# Altium PCB Car-PCB1.PcbDoc (part 2 of 4)
Units mil, origin at the board's own origin, x right, y up, seen from the top; angles counter-clockwise.
Board outline 2206 x 4474.17 mil, 4 copper layers (L1_Top, L2_GND, L3_PWR, L4_BOT), stack 60.912 mil thick; 163 components, 139 nets, 610 pads, 297 vias.
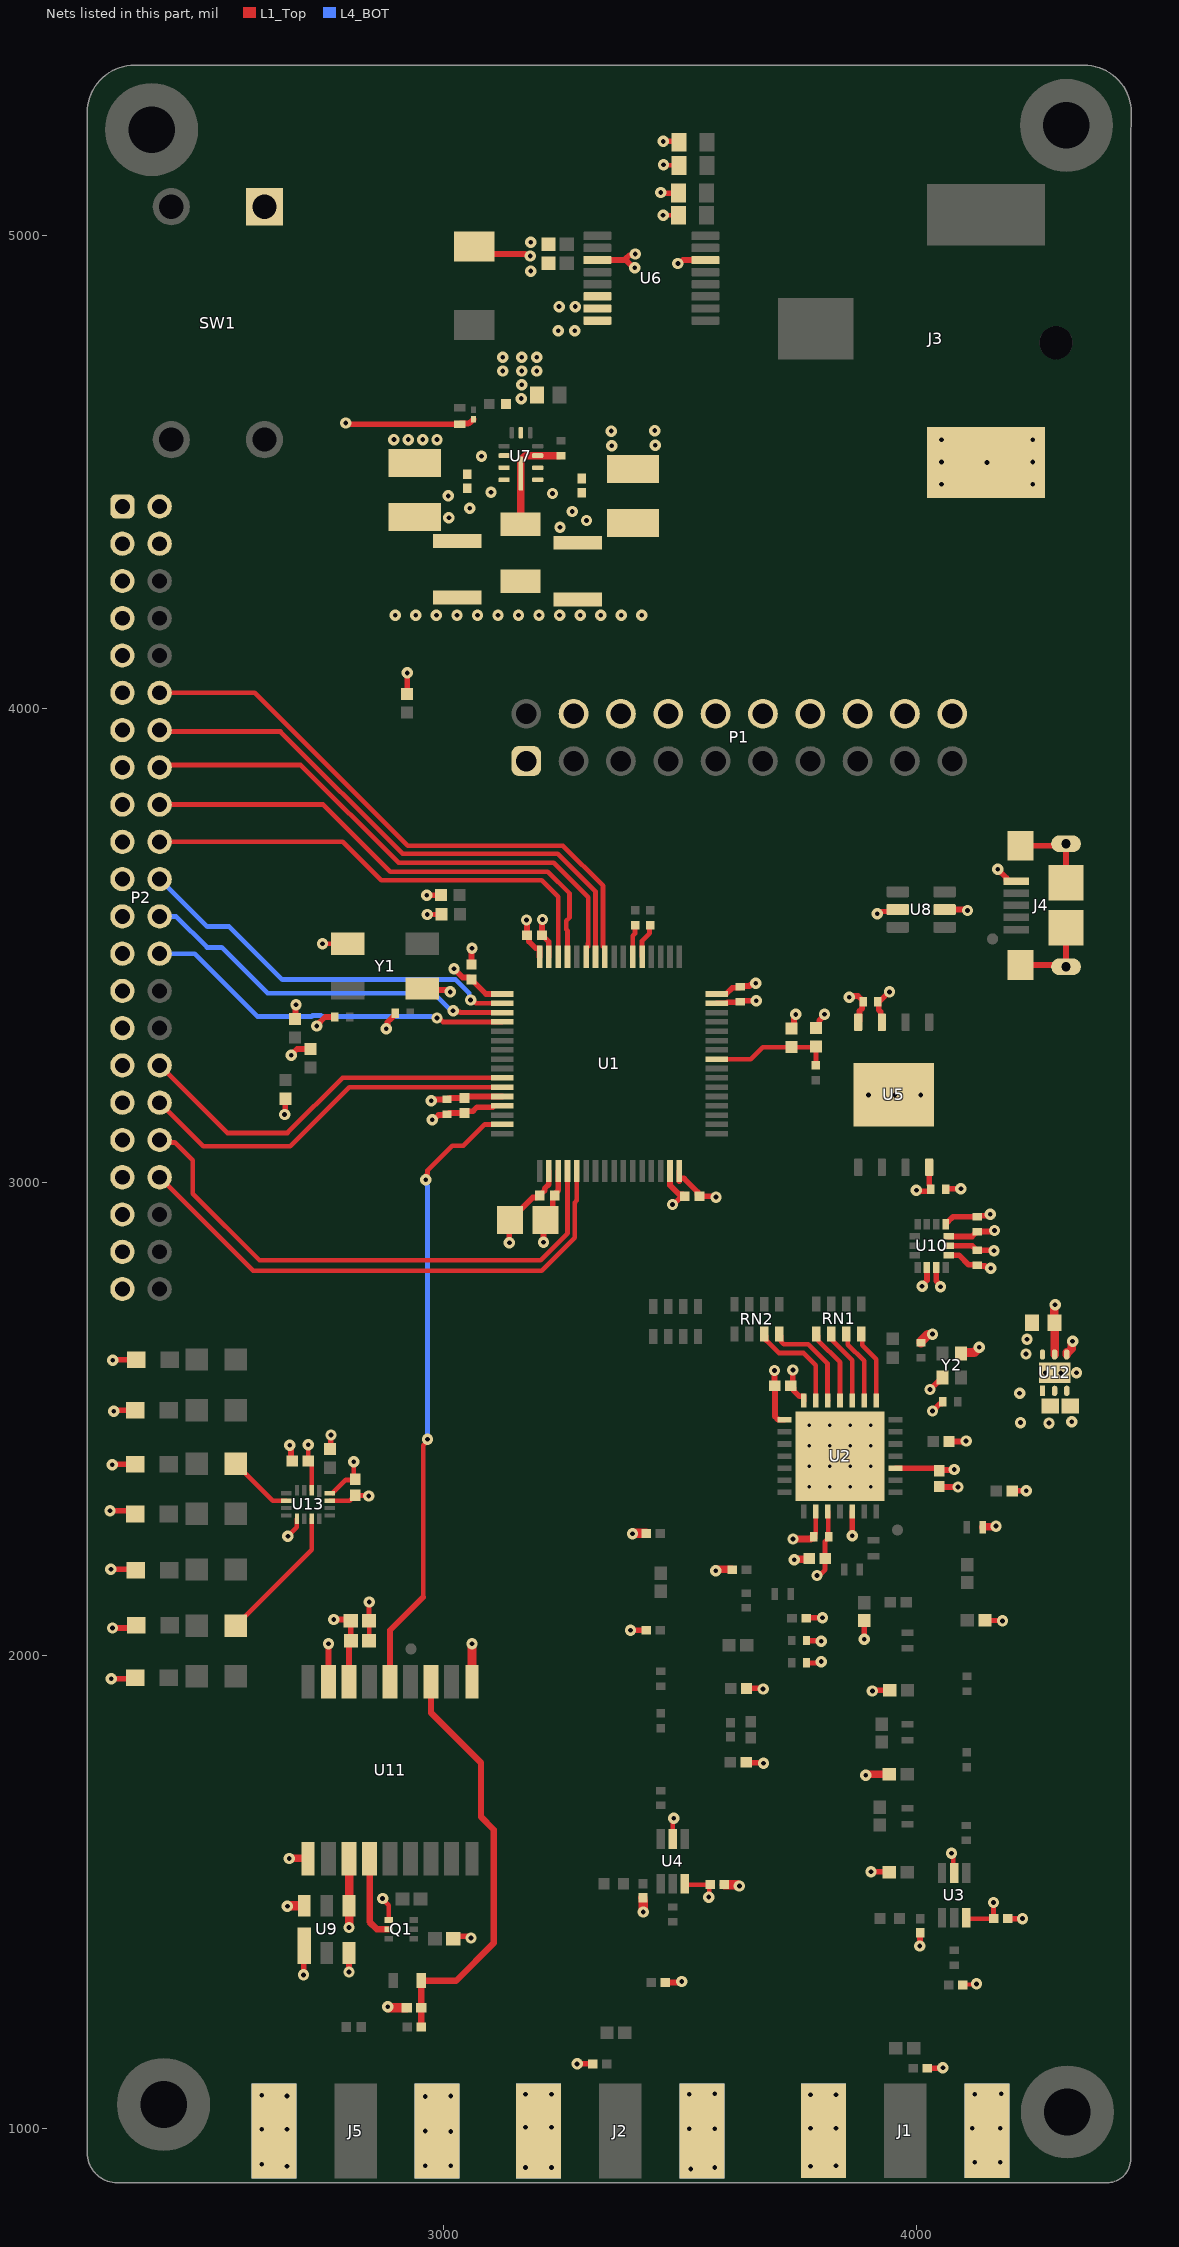
[diagram p4: the nets of this part, all layers, seen from the top]

## Part data (continued)
C50: library part CMP-06035-052573-1, "Ceramic Capacitor 20pF ±5% 16V C0G 01005 (0402 Metric)", Case Code (Imperial)=1005, Case Code (Metric)=0402, Dielectric=C0G, Max Operating Temperature=125°C, Min Operating Temperature=-55°C, Package Quantity=40000, Tolerance=5%, Voltage Rating=16V, Capacitance=20pF, Case/Package=0402, Lead Pitch=0.13mm, Length=0.016inch, Mount="Surface Mount", Packaging="Tape and Reel", Termination=SMD/SMT, Thickness=0.009inch, Voltage Rating (DC)=16V, Width=0.008inch
C51 C52: library part CMP-2000-06361-1, "Chip Monolithic Ceramic Capacitor, 22 uF, +/- 10%, -55 to 85 degC, 2-Pin SMD (1210), RoHS, Tape and Reel", Capacitance=22µF, Manufacturer=Murata, Operating Temperature=-55°C~85°C, Package / Case=1210(3225Metric), Package Description="2-Pin Surface Mount Device, Body 3.2 x 2.5 mm", Package Reference=1210, Ratings=-, Standard Package=1,000, Temperature Coefficient=X5R, Tolerance=±10%, Voltage - Rated=16V, Applications=GeneralPurpose, Catalog Drawings=GRMSeries_1210_2.5, Category=Capacitors, Datasheet URL=https://datasheet.ciiva.com/26915/getdatasheetpartid-88858-26915376.pdf, Datasheet Version=05/2014, Family=CeramicCapacitors, Featured Product=GA3SafetyRecognizedCapsandHi-CapMLCC, Features=-, Height - Seated (Max)=-, Lead Spacing=-, Lead Style=-, Manufacturer URL=http://www.murata.com/, Mounting Technology=SurfaceMount, Mounting Type=SurfaceMount,MLCC, Online Catalog=GRMSeries, Other Names=490-1882-2, Packaging=Tape&Reel(TR), Product Training Modules=High-CapMultilayerCeramicCapacitors, Series=GRM, Size / Dimension="0.126\"Lx0.098\"W(3.20mmx2.50mm)", Thickness (Max)="0.106\"(2.70mm)", Voltage Rating DC=16V
C53 C54 C57: library part CMP-2008-04536-1, Manufacturer=Murata, Part Number=GRM155R60J104KA01D
C55: library part CMP-03020-020906-1, "C0402 47 pF C0G 5.00% 25 V", Capacitance="47 pF", Manufacturer=Kemet, Manufacturer Part Number=C0402C470J3GACAUTO, Package=C0402-BB, Temperature="-55°C to +125°C", Temperature Characteristic=C0G, Temperature Coefficient=15%, Temperature Range High=+125°C, Temperature Range Low=-55°C, Tolerance=0.05, Voltage Rating="25 V", Automotive=No, Category=Cap, ComponentLink2Description=Datasheet, ComponentLink2URL=https://content.kemet.com/datasheets/KEM_C1002_X7R_SMD.pdf, Device Class L1="Passive Components", Device Class L2=Capacitors, Device Class L3="Ceramic Capacitors", Height=0.55mm, Ipc Land Pattern Name=CAPC10050X50, Lead Free=Yes, Material=Ceramic, Octopart=https://octopart.com/c0402c470j3gacauto-kemet-91893770, RoHS=TRUE
C56: library part CMP-2000-06332-1, "Chip Capacitor, 10 nF, 16 V, 10%, -55 to 125 degC, 0402 (1005 Metric), RoHS, Tape and Reel", Capacitance=10000pF, Case Size/Dimension=0402, Dielectric=X7R, Manufacturer=Murata, Package Description="2-Pin Surface Mount Device, Body 1 x 0.5 mm", Rated Voltage=16V, Tolerance (%)=±10%, Datasheet URL=http://psearch.en.murata.com/capacitor/product/GRM155R71C103KA01%23.pdf, Datasheet Version=06/2016, Manufacturer URL=http://www.murata.com/, Mounting Technology=SurfaceMount, Package Reference=0402
C73: library part CMP-08246-005448-1, "Multilayer Ceramic Capacitors 2.2μF ±10% 16V X5R SMD 0603", Case Code (Imperial)=0603, Case Code (Metric)=1608, Dielectric=X5R, Dielectric Material=Ceramic, Max Operating Temperature=85°C, Min Operating Temperature=-55°C, Package Quantity=1, Tolerance=10%, Voltage=16V, Capacitance=2.2uF, Case/Package=0603, Construction=Flat, Depth=0.8mm, Height=0.8mm, Lead Free="Lead Free", Length=1.6mm, Mount="Surface Mount", Packaging="Tape and Reel", Radiation Hardening=No, REACH SVHC="No SVHC", Resistor Type=Ceramic, RoHS Compliant=Yes, Series=C, Termination=SMD/SMT, Thickness=0.035inch, Voltage Rating=16V, Voltage Rating (DC)=16V, Weight=7.1E-05oz, Width=0.031inch
D1: library part CMP-12225-000019-1, "TVS DIODE 5V 13.4V SMB", Breakdown Voltage=6.4V, Clamping Voltage=14.4V, Manufacturer=STMicroelectronics, Max Junction Temp=+150°C, Package=SMB, Peak Pulse Current=275A, Peak Pulse Power=600W, Reverse Standoff Voltage=5V, Temperature="-55°C to +150°C", Temperature Range Low=-55°C, Automotive=No, Category=Diode, ComponentLink2Description=Datasheet, ComponentLink2URL=https://www.st.com/resource/en/datasheet/smbj.pdf, Device Class L1="Circuit Protection", Device Class L2="TVS Diodes", Device Class L3=unset, Digikey Description="TVS DIODE 5V 13.4V SMB", Direction=Unidirectional, Height=2.65mm, Lead Free=Yes, Manufacturer Part Number=SMBJ5.0A-TR, Mouser Description="SMBJ Series 600 W 5 V Uni Directional SMT TVS Diode - DO-214AA", Number Of Channels=1, Octopart=https://octopart.com/smbj5.0a-tr-stmicroelectronics-347079, RoHS=TRUE, Standoff Height=0.05mm, Temperature Range High=+150°C
D2 D3 D4 D5 D6 D7 D8: library part CMP-2000-06620-1, "Ultra Bright AlInGaP Chip LED, 75 mW, -55 to 85 degC, 2-Pin SMD (0805), RoHS, Tape and Reel", Emitting Color=YellowGreen, Forward Current=30mA, Forward Voltage=2.4V, Manufacturer=Lite-On, Operating Temp Range=-55Cto85C, Operating Temperature Classification=Industrial, Package Description="2-Pin Surface Mounted Device, Body 2 x 1.25 mm", Package Reference=LTST-C170KGKT-2, Package Type=ChipLed, Power Dissipation=75W, Power Dissipation Max=75mW, Reverse Voltage=5V, Test Current (It)=20mA, Chip Material=AlGaInP, Datasheet URL=http://optoelectronics.liteon.com/upload/download/DS22-2000-073/S_110_LTST-C170KGKT.pdf, Datasheet Version="Rev. G, 06/2005", DELETED=Compliant, Dominant Wave Length=571nm, Forward Current Max=30mA, High Brightness=Yes, Lens Dimensions=1.4x1.25x0.6mm, Lum Intensity=35mcd, Luminous Intensity=35mcd, Main Category=ChipLED, Manufacturer URL=http://www.us.liteon.com/, Mounting=SurfaceMount, Mounting Technology=SurfaceMount, Number of  Elements=1, Packaging=TapeandReel, Peak Wavelength=574nm, Pin Count=2, Product Depth (mm)=1.25mm, Product Height (mm)=1.1mm, Product Length (mm)=2mm, Rad Hardened=No, Shape Type=Rectangular, Type=Uni-Color, Viewing Angle=130deg
J1 J2 J5: library part CMP-2000-05490-1, "SMA End Launch Jack Receptacle, 50 Ohm, 0 to 18 GHz, -65 to 165 degC, 5-Pin SMD, RoHS, Bulk", Manufacturer=EmersonConnectivitySolutions, Maximum Frequency=18GHz, Operating Temperature Range=-65Cto+165C, Package Description="5-Pin Surface Mount Device, Body 14.275 x 9.525 mm", Body Material=Brass, Body Style=Straight, Brand=Johnson/EmersonConnectivitySolutions, Connector Type=JackPCB, Contact Plating=Gold, Datasheet URL=https://belfuse.com/resources/Johnson/productinformation/pi-142-0701-801.pdf, Datasheet Version=12/2014, Factory Pack Quantity=5, Gender=Jack(Female), Impedance=50Ohms, Manufacturer URL=http://www.cinch.com/, Mounting Technology=SurfaceMount, Orientation=Straight, Package Reference=142-0701-801, Package URL=https://belfuse.com/resources/Johnson/drawings/dr-1420701801.pdf, Product=Connectors, Product Category=RFConnectors/CoaxialConnectors, RF Series=SMA, RoHS=Details, Series=SMA, Termination Style=Solder
J3: library part CMP-47995-000002-1, "CONN PWR JACK 2.1X5.5MM SOLDER", Case/Package=SMD/SMT, Color=Black, Current Rating=5A, Package Quantity=120, Connector Type=Jack, Contact Material="Copper Alloy", Contact Plating=Tin, Gender=Male, Housing Color=Black, Housing Material=Thermoplastic, Mount="Surface Mount", Shielding=Unshielded, Termination=Solder
J4: library part CMP-2000-05119-1, "Micro USB B Type Receptacle, -55 to 85 degC, 5-Pin SMD, RoHS, Tape and Reel", Color=Black, Current Rating=1.8A, Flammability Rating=UL94V-0, Insulation Resistance=1000MOhms, Manufacturer=FCI, Operating Temperature Range=-55Cto+85C, Brand=FCI, Connector Type=MicroUSBTypeBreceptacle, Contact Material=CopperAlloy, Contact Plating=Gold, Datasheet URL=http://datasheet.octopart.com/10118193-0001LF-FCI-datasheet-55953155.pdf, Datasheet Version="Rev. C, 05/2015", Factory Pack Quantity=1200, Gender=Female, Manufacturer URL=http://www.fci.com/, Mounting Angle=Right, Number of Contacts=5Contact, Packaging=Reel, Product=MicroUSBTypeBConnectors, Product Category=USBConnectors, RoHS=Details, Standard=USB2.0, Termination Style=SMD/SMT
L1: library part CMP-06042-006916-1, "Wire Wound RF Inductor 18nH ±5% 370mA 0.27Ω 0402 (1005)", Case Code (Imperial)=0402, Case Code (Metric)=1005, Current Rating=370mA, DC Resistance (DCR)=270mR, Max Operating Temperature=125°C, Min Operating Temperature=-55°C, Package Quantity=10000, Resistor Type=Wirewound, Self Resonant Frequency=4.5GHz, Test Frequency=100MHz, Tolerance=5%, Case/Package=0402, Core Material=Air, DC Current=370mA, Depth=0.7mm, Height=0.5mm, Inductance=18nH, Lead Free="Lead Free", Length=1mm, Max DC Current=370mA, Military Standard=Not, Mount="Surface Mount", Packaging="Tape and Reel", Q Factor=25, Radiation Hardening=No, Shielding=Unshielded, Termination=SMD/SMT, Weight=2.8E-05oz, Width=0.02inch
L2: library part CMP-06042-008786-1, "Wire Wound RF Inductor 2.2nH ±0.2nH 1000mA 0.027Ω 0402 (1005)", Case Code (Imperial)=0402, Case Code (Metric)=1005, Current Rating=1A, DC Resistance (DCR)=27mR, Max Operating Temperature=125°C, Min Operating Temperature=-55°C, Package Quantity=10000, Self Resonant Frequency=14GHz, Test Frequency=100MHz, Case/Package=0402, Core Material=Air, DC Current=1A, Depth=0.7mm, Height=0.5mm, Inductance=2.2nH, Lead Free="Lead Free", Length=1mm, Max DC Current=1A, Military Standard=Not, Mount="Surface Mount", Number of Pins=2, Packaging="Tape and Reel", Q Factor=25, Radiation Hardening=No, REACH SVHC="No SVHC", Shielding=Unshielded, Termination=SMD/SMT, Weight=2.8E-05oz, Width=0.5mm
L3: library part CMP-06042-005424-1, "Wire Wound RF Inductor 12nH ±5% 500mA 0.14Ω 0402 (1005)", Case Code (Imperial)=0402, Case Code (Metric)=1005, Current Rating=500mA, DC Resistance (DCR)=140mR, Max Operating Temperature=125°C, Min Operating Temperature=-55°C, Package Quantity=10000, Resistor Type=Wirewound, Self Resonant Frequency=5.5GHz, Test Frequency=100MHz, Tolerance=5%, Case/Package=0402, Core Material=Air, DC Current=500mA, Depth=0.7mm, Height=0.02inch, Inductance=12nH, Lead Free="Lead Free", Length=1.1mm, Max DC Current=500mA, Military Standard=Not, Mount="Surface Mount", Packaging="Tape and Reel", Q Factor=30, Radiation Hardening=No, Shielding=Unshielded, Termination=SMD/SMT, Weight=2.8E-05oz, Width=0.5mm
L4 L12: library part CMP-2000-06595-2, "Wire Wound RF Inductor 15nH ±5% 460mA 0.16Ω 0402 (1005)", Case Code (Imperial)=0402, Case Code (Metric)=1005, Current Rating=460mA, DC Resistance (DCR)=160mR, Max Operating Temperature=125°C, Min Operating Temperature=-55°C, Package Quantity=10000, Resistor Type=Wirewound, Self Resonant Frequency=5GHz, Test Frequency=100MHz, Tolerance=5%, Case/Package=0402, Core Material=Air, DC Current=460mA, Depth=0.7mm, Height=0.5mm, Inductance=15nH, Lead Free="Lead Free", Length=1mm, Max DC Current=460mA, Military Standard=Not, Mount="Surface Mount", Packaging="Tape and Reel", Q Factor=30, Radiation Hardening=No, Shielding=Unshielded, Termination=SMD/SMT, Weight=2.8E-05oz, Width=0.02inch
L5 L6: library part CMP-06042-007456-1, "Wire Wound RF Inductor 33nH ±5% 260mA 0.63Ω 0402 (1005)", Case Code (Imperial)=0402, Case Code (Metric)=1005, Current Rating=260mA, DC Resistance (DCR)=630mR, Max Operating Temperature=125°C, Min Operating Temperature=-55°C, Package Quantity=10000, Resistor Type=Wirewound, Self Resonant Frequency=3.2GHz, Test Frequency=100MHz, Tolerance=5%, Case/Package=0402, Core Material=Air, DC Current=260mA, Depth=0.6mm, Height=0.5mm, Inductance=33nH, Lead Free="Lead Free", Length=1mm, Max DC Current=260mA, Military Standard=Not, Mount="Surface Mount", Packaging="Tape and Reel", Q Factor=25, Radiation Hardening=No, Shielding=Unshielded, Termination=SMD/SMT, Weight=2.8E-05oz, Width=0.5mm
L7 L9 L13 L14 L15: library part CMP-06042-014117-1, "Multilayer type RF Inductor 10nH ±5% 0.26Ω 500mA 0402", Case Code (Imperial)=0402, Case Code (Metric)=1005, Current Rating=300mA, DC Resistance (DCR)=260mR, Max Operating Temperature=125°C, Min Operating Temperature=-55°C, Package Quantity=10000, Self Resonant Frequency=3.4GHz, Test Frequency=100MHz, Tolerance=5%, Case/Package=0402, Core Material=Air, DC Current=300mA, Depth=0.55mm, Height=0.5mm, Height - Seated (Max)=0.022inch, Inductance=10nH, Lead Free="Lead Free", Length=0.039inch, Max DC Current=300mA, Military Standard=Not, Mount="Surface Mount", Packaging="Tape and Reel", Q Factor=8, Radiation Hardening=No, Shielding=Unshielded, Termination=SMD/SMT, Width=0.5mm
L8: library part CMP-06042-008294-1, "Multilayer type RF Inductor 6.2nH ±0.3nH 0.2Ω 600mA 0402", Case Code (Imperial)=0402, Case Code (Metric)=1005, Current Rating=300mA, DC Resistance (DCR)=220mR, Max Operating Temperature=125°C, Min Operating Temperature=-55°C, Package Quantity=10000, Self Resonant Frequency=4.5GHz, Test Frequency=100MHz, Case/Package=0402, Core Material=Air, DC Current=300mA, Depth=0.55mm, Height=0.5mm, Height - Seated (Max)=0.022inch, Inductance=6.2nH, Lead Free="Lead Free", Length=1mm, Max DC Current=300mA, Military Standard=Not, Mount="Surface Mount", Packaging="Tape and Reel", Q Factor=8, Radiation Hardening=No, Shielding=Unshielded, Termination=SMD/SMT, Width=0.02inch
L10: library part CMP-006-00005-3, "Chip Inductor, 10 uH, +/- 10%, -40 to 125 degC, 1210 (3225 Metric), RoHS, Tape and Reel", Case/Package=1210, Current Rating=140mA, Inductance=10µH, Inductance Tolerance=10%, Manufacturer=Bourns, Max Operating Temperature=100°C, Min Operating Temperature=-20°C, Package Description="2-Pin Surface Mount Device, Body 3.2 x 2.5 mm", Package Quantity=1, Resistance=2.1Ohm, Self Resonant Frequency=30MHz, Core Material=Ferrite, Datasheet URL=http://www.murata.com/~/media/webrenewal/support/library/catalog/products/emc/emifil/c30e.ashx?la=en-gb, Datasheet Version=Aug-14, Mounting Technology=SM, Package Reference=1210, Packaging=TapeandReel, Pins=2, Q Factor=30, RoHS Compliant=True, Shielding=Unshielded, Tolerance=10%
L11: library part CMP-2000-06578-2, "Multilayer type RF Inductor 27nH ±5% 0.46Ω 350mA 0402", Case Code (Imperial)=0402, Case Code (Metric)=1005, Current Rating=300mA, DC Resistance (DCR)=460mR, Inductance Tolerance=5%, Max Operating Temperature=125°C, Min Operating Temperature=-55°C, Package Quantity=10000, Self Resonant Frequency=1.7GHz, Test Frequency=100MHz, Case/Package=0402, Core Material=Air, DC Current=300mA, Depth=0.55mm, Height=0.5mm, Height - Seated (Max)=0.022inch, Inductance=27nH, Lead Free="Lead Free", Length=1mm, Max DC Current=300mA, Military Standard=Not, Mount="Surface Mount", Packaging="Tape and Reel", Q Factor=8, REACH SVHC="No SVHC", Shielding=Unshielded, Termination=SMD/SMT, Tolerance=5%, Width=0.02inch
P1: library part CMP-1502-00010-2, Color=Black, Contact Resistance=20mΩ, Current Rating=3A, Flammability Rating="UL94 V-0", Insulation Resistance=1GΩ, Max Operating Temperature=105°C, Min Operating Temperature=-40°C, Operating Supply Voltage=250V, Connector Type="Male Pin", Contact Gender=Male, Contact Material=Copper, Contact Plating=Gold, Gender=Male, Height=8.85mm, Housing Material=PBT, Insulation=Insulated, Insulation Material=PBT, Lead Pitch=2.54mm, Length=33.06mm, Mount="Through Hole", NexarPartId=8917785, Number of Contacts=20, Number of Pins=20, Number of Positions=20, Number of Rows=2, Orientation=Vertical, Pitch=2.54mm, REACH SVHC=Unknown, RoHS=Compliant, Row Spacing=2.54mm, Termination="Through Hole", Voltage Rating=250V, Voltage Rating (DC)=250V, Width=33.06mm
P2: library part CMP-1502-00974-3, Contact Resistance=20mΩ, Current Rating=2A, Operating Supply Voltage=200V, Gender=Male, Lead Pitch=2mm, NexarPartId=61924794, Number of Pins=44, Orientation=Vertical, RoHS=Non-Compliant
PTH1 PTH2 PTH3 PTH4: library part CMP-00028-00004-2, "M2 PTH (2.5mm), 5mm pad", Pins=1
Q1: library part CMP-1058-00825-1, "Small Signal MOSFET, Complementary 20 V, 540 mA / -430 mA, with ESD Protection, 6-Pin SOT-563, Pb-Free, Tape and Reel", Manufacturer="On Semiconductor", Package Type=SOT-563, Channel Polarity=Complementary, ComponentLink1Description="Manufacturer URL", ComponentLink1URL=http://www.onsemi.com/, ComponentLink2Description=Datasheet, ComponentLink2URL=http://www.onsemi.com/pub_link/Collateral/NTZD3155C-D.PDF, ComponentLink3Description="Package Specification", ComponentLink3URL=http://www.onsemi.cn/pub_link/Collateral/463A-01.PDF, Configuration=Dual, Crss Typ (pF)=10, DatasheetVersion="Rev. 3", Mounting Technology="Surface Mount", PackageDescription="6-Pin Small Outline Transistor, Body 1.6 x 1.2 mm, Pitch 0.5 mm", PackageReference=SOT-563-6-463A-01, PackageVersion="Rev. F, 04/2005", Packing="Tape and Reel", PartNumber=NTZD3155CT1G, RoHS=Pb-Free, V(BR)DSS Min (V)=20, VGS Max (V)=6, VGS(th) Max (V)=1
R1 R2 R9: library part CMP-009-00019-5, "Chip Resistor, 10 KOhm, +/- 1%, 63 mW, -55 to 155 degC, 0402 (1005 Metric)", Case/Package=0402, Max Operating Temperature=155°C, Min Operating Temperature=-55°C, Power=63mW, Tolerance=1%, Voltage Rating=50V, Mounting Technology=SM, Pins=2, RoHS Compliant=True
R3 R5 R6 R7 R15 R33: library part CMP-009-00015-5, "Chip Resistor, 10 KOhm, +/- 1%, 0.1 W, -55 to 155 degC, 0402 (1005 Metric)", Case/Package=0402, Max Operating Temperature=155°C, Min Operating Temperature=-55°C, Power=100mW, Tolerance=1%, Voltage Rating=50V, Mounting Technology=SM, Pins=2, RoHS Compliant=True
R4 R8 R10 R29 R30: library part CMP-2000-07451-1, "Chip Resistor, 0 Ohm, 0.1 W, -55 to 155 degC, 0402 (1005 Metric), RoHS, Tape and Reel", Case Code (Imperial)=0402, Case Code (Metric)=1005, Manufacturer=Panasonic, Max Operating Temperature=155degC, Max Power Dissipation=100mW, Min Operating Temperature=-55degC, Package Description="2-Pin Surface Mount Device, Body 1 x 0.5 mm", Package Quantity=1, Package Reference=402, Resistance=0mOhm, Temperature Coefficient=600ppm/��C, Tolerance=5%, Voltage Rating=50V, Case/Package=0402, Composition=ThickFilm, Contact Plating=Tin, Datasheet URL=https://industrial.panasonic.com/cdbs/www-data/pdf/RDA0000/AOA0000C301.pdf, Datasheet Version=03/2015, Depth=0.5mm, Height=0.35mm, Lead Free=LeadFree, Length=1mm, Manufacturer URL=http://www.panasonic.com/, Military Standard=Not, Mount=SurfaceMount, Mounting Technology=SurfaceMount, Number of Terminations=2, Packaging=TapeandReel, Power Rating=100mW, Radiation Hardening=No, REACH SVHC=NoSVHC, RoHSCompliant=True, Termination=SMD/SMT, Voltage Rating (DC)=50V, Width=0.02inch
R11 R14: library part CMP-1011-00074-3, "RES Thick Film, 1kΩ, 5%, 0.063W, 200ppm/°C, 0402", Case Code (Imperial)=0402, Case Code (Metric)=1005, Max Operating Temperature=155°C, Max Power Dissipation=63mW, Min Operating Temperature=-55°C, Package Quantity=1, Resistance=1kR, Temperature Coefficient=200ppm/°C, Tolerance=5%, Voltage Rating=50V, Case/Package=0402, Composition="Thick Film", Contact Plating=Tin, Depth=0.5mm, Features="Automotive AEC-Q200", Height=0.016inch, Length=1mm, Military Standard=Not, Mount="Surface Mount", Number of Pins=2, Number of Terminations=2, Packaging="Tape and Reel", Power Rating=63mW, Radiation Hardening=No, Termination=SMD/SMT, Weight=2.3E-05oz, Width=0.5mm, Working Voltage=50V
R12: library part CMP-08839-028230-1, "10Ω ±5% 0.25W 0603 Anti-Surge Chip Resistor AEC-Q200", Case Code (Imperial)=0603, Case Code (Metric)=1608, Max Operating Temperature=155°C, Max Power Dissipation=250mW, Min Operating Temperature=-55°C, Resistor Type="Thick Film", Temperature Coefficient=200ppm/°C, Tolerance=5%, Case/Package=0603, Features="Automotive AEC-Q200", Number of Terminations=2, Packaging="Tape and Reel", Resistance=10R, RoHS Compliant=Yes, Series=ESR
R13 R26 R27 R28 R31 R32 R34: library part CMP-03211-004765-1, "RES SMD 470Ω 0.1% 1/16W 0603 /  / CPF0603B470RE", Manufacturer="TE Connectivity", Manufacturer Part Number=CPF0603B470RE, Package=CPF0603, Power Rating=0.063W, Resistance=470Ω, Temperature="-55°C to +155°C", Temperature Coefficient=25ppm/°C, Temperature Range High=+155°C, Temperature Range Low=-55°C, Tolerance=0.1%, Voltage Rating=50V, Automotive=No, Category=Res, ComponentLink2Description=Datasheet, ComponentLink2URL=https://www.te.com/commerce/DocumentDelivery/DDEController?Action=showdoc&DocId=Data+Sheet%7F1773200%7FM%7Fpdf%7FEnglish%7FENG_DS_1773200_M.pdf%7F3-1676481-2, Composition="Thin Film", Device Class L1="Passive Components", Device Class L2=Resistors, Device Class L3="Chip SMD Resistors", Height=0.55mm, Ipc Land Pattern Name=RESC15580X45, Lead Free=Yes, Octopart=https://octopart.com/cpf0603b470re-te+connectivity-23376607, octopart_url=https://octopart.com/cpf0603b470re-te+connectivity-23376607, Packaging="5k Reel", RoHS=TRUE, Series=CPF
R16: library part CMP-2002-03715-1, Manufacturer="KOA Speer", Part Number=RK73B1ETTP104J
R17 R23: library part CMP-2000-05022-1, "Resistor, 10 KOhm, +/- 5%, 100 mW, -55 to 155 degC, 0603 (1608 Metric), RoHS, Tape and Reel", Case Code - in=0603, Case Code - mm=1608, Manufacturer=Yageo, Operating Temperature Range=-55Cto+155C, Package Description="2-Pin Surface Mount Device, Body 1.6 x 0.8 mm", Package Reference=603, Power Rating=100mW, Resistance=10kOhms, Temperature Coefficient=100PPM/C, Tolerance=5%, Voltage Rating=50V, Datasheet URL=http://www.farnell.com/datasheets/443971.pdf, Datasheet Version="Rev. 4, 04/2009", Manufacturer URL=http://www.yageo.com/, Packaging=Reel, Product=ThickFilmResistorsGeneralPurpose, Series=RC, Termination Style=SMD/SMT
R18: library part CMP-2002-08129-2, "RES Thick Film, 100Ω, 5%, 0.063W, 200ppm/°C, 0402", Case Code (Imperial)=0402, Case Code (Metric)=1005, Max Operating Temperature=155°C, Max Power Dissipation=63mW, Min Operating Temperature=-55°C, Package Quantity=10000, Temperature Coefficient=200ppm/°C, Tolerance=5%, Voltage Rating=50V, Case/Package=0402, Composition="Thick Film", Contact Plating=Tin, Depth=0.5mm, Features="Automotive AEC-Q200", Height=0.016inch, Length=1mm, Military Standard=Not, Mount="Surface Mount", Number of Terminations=2, Packaging="Tape and Reel", Power Rating=63mW, Radiation Hardening=No, Resistance=100R, Termination=SMD/SMT, Weight=2.3E-05oz, Width=0.02inch, Working Voltage=50V
R19: library part CMP-02407-010951-1, "RES 100K OHM 1% 1/16W 0402", Case/Package=SMD/SMT, Max Operating Temperature=155°C, Min Operating Temperature=-55°C, Power Rating=62.5mW, Resistance=100kR, Resistor Type="Thick Film", Temperature Coefficient=100ppm/°C, Tolerance=1%, Contact Plating=Tin, Lead Free="Lead Free", Length=1mm, Mount="Surface Mount", RoHS Compliant=Yes, Termination=Wraparound
R20: library part CMP-1011-00695-2, Manufacturer="Vishay Dale", Part Number=CRCW040243K2FKED
R24 R25: library part CMP-2100-03667-1, "Chip Resistor, 0 Ohm, +/- 5%, 0.1 W, -55 to 155 degC, 0603 (1608 Metric), RoHS, Tape and Reel", Case Code (Imperial)=0603, Case Code (Metric)=1608, Manufacturer=Yageo, Max Operating Temperature=155degC, Min Operating Temperature=-55degC, Package Description="2-Pin Surface Mount Device, Body 1.6 x 0.8 mm", Package Quantity=5000, Power Rating=100mW, Resistance=0mOhm, Temperature Coefficient=200ppm/degreesC, Tolerance=5%, Voltage Rating=50V, Case/Package=0603, Composition=ThickFilm, Contact Plating=Tin, Datasheet URL=http://www.yageo.com/NewPortal/yageodocoutput?fileName=/pdf/R-Chip/PYu-RC_Group_51_RoHS_L_5.pdf, Datasheet Version="Rev. 5, 10/2016", Depth=0.8mm, Height=0.45mm, Lead Free=LeadFree, Length=1.6mm, Manufacturer URL=http://www.yageo.com/, Military Standard=Not, Number of Pins=2, Package Reference=0603, Packaging=TapeandReel, Radiation Hardening=No, REACH SVHC=NoSVHC, RoHSCompliant=true, Termination=SMD/SMT, Voltage Rating (DC)=50V, Width=0.8mm
RN1 RN2 RN3: library part CMP-05421-000004-1, "RES ARRAY 4 RES 100 OHM 1206", Case Code (Imperial)=1206, Case Code (Metric)=3216, Max Operating Temperature=125°C, Min Operating Temperature=-55°C, Number of Resistors=4, Package Quantity=1, Power Per Element=62.5mW, Resistance Tolerance=5%, Temperature Coefficient=200ppm/°C, Voltage Rating=50V, Voltage Rating (DC)=100V, Case/Package=1206, Circuit Type=Isolated, Contact Plating=Tin, Depth=1.6mm, Height=0.5mm, Lead Free="Lead Free", Length=3.2mm, Military Standard=Not, Mount="Surface Mount", Number of Contacts=8, Number of Elements=4, Number of Pins=8, Number of Terminals/Pins=8, Packaging="Tape and Reel", Radiation Hardening=No, REACH SVHC="No SVHC", Resistance=100R, RoHS Compliant=Yes, Series=EXB, Technology="THICK FILM", Terminal Pitch=0.8mm, Termination=Convex, Tolerance=5%, Width=0.063inch
SW1: library part CMP-03407-000037-1, "SWITCH TACTILE SPST-NO 0.05A 24V", Actuator Color=Black, Contact Current Rating=50mA, Contact Resistance=100mR, Max Operating Temperature=85°C, Max Voltage Rating (DC)=12V, Min Operating Temperature=-35°C, Operating Force=1.57N, Package Quantity=400, Voltage Rating=24V, Actuator Length=3.4mm, Actuator Material=Polyester, Contact Material=Brass, Contact Plating=Silver, Current Rating=50mA, Depth=14.1mm, Electrical Life=100000Cycles, Illumination Type=Non-Illuminated, Length=12mm, Max Current Rating=50mA, Mechanical Life=100000Cycles, Mount="Through Hole", Orientation=Straight, Packaging="Loose Piece", Radiation Hardening=No, RoHS Compliant=Yes, Series="FSM100 ~ 104", Switch Function=Off-Mom, Switch Travel=0.3mm, Termination="PC Pins", Throw Configuration=SPST, Type=Switch, Voltage Rating (DC)=12V, Width=12mm
TP1 TP2 TP3: library part CMP-00028-00002-2, "0.6mm round", Pins=1
U1: library part CMP-12105-000039-1, "IC MCU 32BIT 1MB FLASH 64LQFP", Ambient Temperature Range High=+85°C, Ambient Temperature Range Low=-40°C, Frequency=80MHz, Manufacturer=STMicroelectronics, Max Junction Temp=+105°C, Max Supply Voltage=3.6V, Min Supply Voltage=1.71V, Package=LQFP64-5W, Temperature="-40°C to +105°C", Automotive=No, Category=IC, ComponentLink2Description=Datasheet, ComponentLink2URL=https://www.st.com/content/ccc/resource/technical/document/datasheet/c5/ed/2f/60/aa/79/42/0b/DM00108832.pdf/files/DM00108832.pdf/jcr:content/translations/en.DM00108832.pdf, Core Architecture="ARM Cortex-M4", Data Bus Width=32bits, Device Class L1="Integrated Circuits (ICs)", Device Class L2="Embedded Processors and Controllers", Device Class L3=Microcontrollers, Digikey Description="IC MCU 32BIT 1MB FLASH 64LQFP", Height=1.6mm, Interface=I2C,SPI,UART,USART,CAN,USB,LIN,IrDA,SMBus,Other, Ipc Land Pattern Name=QFP50P1200X1200X160-64, Lead Free=Yes, Manufacturer Part Number=STM32L476RGT6TR, Memory Size=1MBytes, Memory Type=FLASH, Mouser Description="MCU 32-Bit STM32 ARM Cortex M4 RISC 1MB Flash 1.8V/2.5V/3.3V 64-Pin LQFP T/R", Number Of A/D Converters=3, Number Of Adc Channels=16, Number Of Cores=1, Number Of I2C Channels=3, Number of I/Os=51, Number Of Pwm Channels=28, Number Of Spi Channels=3, Number Of Timers/Counters=13, Number Of Uart Channels=6, Number Of Usb Channels=1, Octopart=https://octopart.com/stm32l476rgt6tr-stmicroelectronics-74146120, Ram Size=128KBytes, RoHS=TRUE, Standoff Height=0.05mm, Temperature Range High=+105°C, Temperature Range Low=-40°C
U2: library part CMP-2000-05356-1, "Low Power Long Range Transceiver, 137 to 1020 MHz, -40 to 85 degC, 28-Pin QFN, RoHS, Tape and Reel", Current - Receiving=10.8mA~12mA, Current - Transmitting=20mA~120mA, Frequency=137MHz~1.02GHz, Manufacturer=Semtech, Operating Temperature=-40degC~85degC, Package / Case=28-VQFNExposedPad, Package Description="28-Pin Quad Flat No-lead Package, Body 6 x 6 mm, Pitch 0.65 mm", Package Reference=QFN-28, Power - Output=20dBm, Standard Package=3,000, Voltage - Supply=1.8V~3.7V, Category=RF/IFandRFID, Data Rate (Max)=300kbps, Datasheet URL=http://www.semtech.com/images/datasheet/sx1276.pdf, Datasheet Version="Rev. 4, 03/2015", Design Resources=SX127xReferenceDesignOverviewDevelopmentToolSelector, Family=RFTransceiverICs, Featured Product=SX1276LongRangeTransceiver, GPIO=6, Manufacturer URL=http://www.semtech.com/, Memory Size=-, Mfg Application Notes=LoRaModulation:CrystalOscillatorGuidanceSX12xxSoftwareImplementationofDataWhiteningandCRCSX127xLoRaLowEnergyDesignGuideSX127xLoRaModemDesignersGuide, Modulation=FSK,GFSK,GMSK,MSK,OOK, Online Catalog=SX1276,SX1277andSX1278, Other Names=SX1276IMLTRTTR, Packaging=Tape&Reel(TR), PCN Design/Specification=CopperWire25/Mar/2014, Protocol=LoRa™, RF Family/Standard=802.15.4, Sensitivity=-148dBm, Serial Interfaces=SPI, Series=-, Type=TxRx+MCU
U3 U4: library part CMP-2000-05298-1, "IC RF Switch SPDT, 50 Ohm, 6-Pin SC70, RoHS, Tape and Reel", Frequency - Lower=10MHz, Frequency - Upper=3GHz, Insertion Loss @ Frequency=0.5dB@2GHz, Isolation @ Frequency=20dB@2GHz(typ), Manufacturer="Peregrine Semiconductor", Operating Temperature=-40degC~85degC, Package / Case=6-TSSOP,SC-88,SOT-363, Package Description="6-Pin Small Outline Transistor, Body 2.05 x 1.25 mm, Pitch 0.65 mm", Package Reference=SC-70-6, Standard Package=3,000, Voltage - Supply=1.8V~3.3V, Category=RF/IFandRFID, Circuit=SPDT, Datasheet URL=https://datasheet.ciiva.com/15100/getdatasheetpartid-685660-15100501.pdf, Datasheet Version=Jan-11, Family=RFSwitches, Features=Single/DualLineControl, IIP3=55dBm(typ), Impedance=50Ohm, Manufacturer URL=http://www.psemi.com/, Online Catalog=PE4259, Other Names=1046-1011-24259-63-ND425963PE4259PE4259SCBC-ZPE4259SCBC-Z-ND, P1dB=29dBm(typ)IP1dB, Packaging=Tape&Reel(TR), RF Type=GeneralPurpose, Series=UltraCMOS, Supplier Device Package=SC-70-6, Topology=Reflective
U5: library part CMP-031-00007-1, "FLASH - NOR Memory IC 512Mb (64M x 8) SPI - Quad I/O 133 MHz 8-WSON (8x6)", Case/Package=Package, Check_prices=https://www.snapeda.com/parts/W25Q512JVEIQ/Winbond/view-part/?ref=eda, Component Type=Standard, Design Item ID=W25Q512JVEIQ, MF="Winbond Electronics", MP=W25Q512JVEIQ, Pins=9, SnapEDA_Link=https://www.snapeda.com/parts/W25Q512JVEIQ/Winbond/view-part/?ref=snap, Source=W25Q512JVEIQ.SchLib
U6: library part CMP-04910-000015-1, "IC MONITOR PWR/CURR 16TSSOP", Ambient Temperature Range High=+125°C, Ambient Temperature Range Low=-40°C, Manufacturer="Texas Instruments", Max Junction Temp=+150°C, Max Supply Voltage=5.5V, Min Supply Voltage=2.7V, Nominal Supply Current=310uA, Output Current=10mA, Package=PW0016A, Temperature="-40°C to +125°C", Automotive=No, Category=IC, ComponentLink2Description=Datasheet, ComponentLink2URL=http://www.ti.com/lit/ds/symlink/ina260.pdf, Device Class L1="Integrated Circuits (ICs)", Device Class L2="Power Management ICs", Device Class L3=unset, Digikey Description="IC MONITOR PWR/CURR 16TSSOP", Height=1.2mm, Lead Free=Yes, Manufacturer Part Number=INA260AIPWR, Octopart=https://octopart.com/ina260aipwr-texas+instruments-75199489, RoHS=TRUE, Standoff Height=0.05mm, Temperature Range High=+125°C, Temperature Range Low=-40°C
U7: library part CMP-04918-000354-1, "IC REGULATOR BUCK"
U8: library part CMP-004-00031-1, "17V Clamp 5A (8/20Âµs) Ipp Tvs Diode Surface Mount SOT-23-6", Case/Package="SOT-23-6 STMicroelectronics", Availability="In Stock", Check_prices=https://www.snapeda.com/parts/USBLC6-2SC6/STMicroelectronics/view-part/?ref=eda, Component Type=Standard, Design Item ID=USBLC6-2SC6, MF=STMicroelectronics, MP=USBLC6-2SC6, Pins=6, Price=None, Purchase-URL=https://pricing.snapeda.com/search/part/USBLC6-2SC6/?ref=eda, SnapEDA_Link=https://www.snapeda.com/parts/USBLC6-2SC6/STMicroelectronics/view-part/?ref=snap, Source=USBLC6-2SC6.SchLib
U9: library part CMP-026-000001-1, "No Description Available", Mfr_Name=Qualcomm, ComponentLink1Description="New link", Design Item ID=B39162B3913U410, RefDes=RefDes, Source=B39162B3913U410.SchLib, Type=Type
U10: library part CMP-12177-000010-1, "INEMO INERTIAL MODULE: 3D ACCELE", Manufacturer=STMicroelectronics, Max Supply Voltage=3.6V, Min Supply Voltage=1.62V, Operating Supply Current=0.55mA, Package=LGA-14L-DM00249496, Temperature="-40°C to +85°C", Temperature Range High=+85°C, Temperature Range Low=-40°C, Accel Range=2/4/8/16g, Accel Sensitivity=0.061/0.122/0.244/0.488mV/g, Automotive=No, Category=IC, ComponentLink2Description=Datasheet, ComponentLink2URL=https://www.st.com/resource/en/datasheet/lsm6dsox.pdf, Device Class L1=Sensors, Device Class L2="Motion Sensors", Device Class L3="Inertial Measurement Units (IMUs)", Digikey Description="INEMO INERTIAL MODULE: 3D ACCELE", Footprint Url=https://www.st.com/content/ccc/resource/technical/document/technical_note/73/17/9c/16/dd/96/4a/01/CD00134799.pdf/files/CD00134799.pdf/jcr:content/translations/en.CD00134799.pdf, Gyro Range=125/250/500/1000/2000°/s, Gyro Sensitivity=4.375/8.75/17.5/35/70LSB/°/s, Height=0.86mm, Lead Free=Yes, Manufacturer Part Number=LSM6DSOXTR, Mouser Description="LSM6DSOX: 3.6 V 3 Axis Accelerometer Gyroscope iNEMO Inertial Module - LGA-14L", Octopart=https://octopart.com/lsm6dsoxtr-stmicroelectronics-98102600, RoHS=TRUE, Sensor Output=I2C,SPI,Other, Sensor Type=Temperature,Accelerometer,Gyroscope
U11: library part CMP-207130-000026-1, "GNSS LCC RX, ROM, TCXO, LNA, SAW"
U12: library part CMP-04917-000203-1, "VOLTAGE COMPARATOR"
U13: library part CMP-07097-000002-1, "IC GPIO EXPANDER I2C 8B 16-UMLP", Ambient Temperature Range High=+85°C, Ambient Temperature Range Low=-40°C, Frequency=400kHz, Manufacturer="ON Semiconductor", Max Junction Temp=+150°C, Max Supply Voltage=4V, Min Supply Voltage=1.65V, Nominal Supply Current=300uA, Package=523BF, Temperature="-40°C to +85°C", Automotive=No, Category=IC, ComponentLink2Description=Datasheet, ComponentLink2URL=https://www.onsemi.com/pub/Collateral/FXL6408-D.pdf, Device Class L1="Integrated Circuits (ICs)", Device Class L2="Interface ICs", Device Class L3="I/O Expanders", Digikey Description="IC GPIO EXPANDER I2C 8B 16-UMLP", Footprint Url=https://www.onsemi.com/pub/Collateral/523BF.PDF, Height=0.55mm, Interface=I2C, Lead Free=Yes, Manufacturer Part Number=FXL6408UMX, Mouser Description="FXL6408 Series 1.65 to 4 V Open Drain 8-Bit I2C-Controlled GPIO Expander-UMLP-16", Number of I/Os=8, Octopart=https://octopart.com/fxl6408umx-on+semiconductor-84328710, RoHS=TRUE, Standoff Height=0mm, Temperature Range High=+85°C, Temperature Range Low=-40°C
Y1: library part CMP-27762-008385-1, "Crystal 16MHz ±10ppm 10pF SMD-4 5mm x 3.2mm", Case/Package=SMD/SMT, ESR (Equivalent Series Resistance)=50R, Frequency=16MHz, Frequency Stability=10ppm, Load Capacitance=10pF, Max Operating Temperature=70°C, Min Operating Temperature=-20°C, Package Quantity=1000, Frequency Tolerance=10ppm, Height=0.043inch, Length=0.197inch, Mount="Surface Mount", Packaging="Tape and Reel", Weight=0.001764oz, Width=3.2mm
Y2: library part CMP-27762-009665-1, "Crystal 32MHz ±10ppm 10pF SMD-4 2mm x 1.6mm", Case/Package=SMD/SMT, ESR (Equivalent Series Resistance)=80R, Frequency Stability=10ppm, Load Capacitance=10pF, Max Operating Temperature=70°C, Min Operating Temperature=-20°C, Frequency=32MHz, Frequency Tolerance=10ppm, Mount="Surface Mount", Packaging="Tape and Reel"

## Via types
v1: diameter 24, hole 10, L1_Top to L4_BOT, 281 vias
v2: diameter 19.68, hole 7.87, L1_Top to L4_BOT, 16 vias

## Nets (pads, with @x,y where several pads share a name; then routed paths per layer and width w, separated by ;. In a path a pad name is that pad's centre, name@x,y a point inside that pad or via, vN(x,y) a via of type N, cw(c..) or ccw(c..) an arc to the next point about the centre after c; other vN are vias at no path point)
12: C46.2 L10.1 U7.3 U7.12 | length 221.1
  L1_Top w15.75: L10.1@3163,4390.04 3164.32,4391.35 U7.12@3164.32,4497.35 3164.32,4526.04 3173.54,4535.27 U7.3@3199.75,4535.27 C46.2@3245.05,4535.27
+3V3: C1.1 C2.1 C3.1 C4.1 C5.1 C6.2 C7.2 C8.2 C50.2 C51.2 C52.2 C53.1 C54.1 C58.2 C59.2 C68.1 C69.1 C70.2 C71.1 L10.2 P1.1 P2.2 P2.4 R1.2 R3.2 R5.2 R6.2 R7.2 R9.2 R19.2 R33.1 U1.1 U1.13 U1.19 U1.32 U1.48 U1.64 U5.3 U5.8 U10.5 U10.8 U11.7 U11.8 U13.2 U13.15 | length 2060.1
  L1_Top w10: v1(2715,2445) C68.1@2715,2411 2715.84,2411 2722.11,2404.73 2722.11,2399.2 2722.44,2398.87 U13.2@2722.44,2349.41 ; U13.15@2760.57,2327.03 2802.29,2327.03 2807.61,2332.35 2809.32,2332.35 2814.59,2337.62 C69.1@2814.59,2338.46 2815.32,2337.73 2842.12,2337.73 v1(2842.86,2337)
  L1_Top w11.81: U11.8@2757.87,1944.88 v1(2757.87,2025) ; v1(2769,2076) 2801.71,2076 C53.1@2804.71,2073 2804.71,2031.9 C54.1@2805.12,2031.5 ccw(c2805.12,2027.56) 2801.18,2027.56 U11.7@2801.18,1944.88 ; v1(2965.52,3606) 2966.02,3606.5 2994.81,3606.5 R1.2@2995.31,3607
  L1_Top w12: v1(2665,3143) 2666.06,3144.06 2666.06,3175.38 R6.2@2667,3176.31 ; v1(2679,3268) 2679,3268.95 2691.57,3281.52 2719.83,3281.52 R5.2@2720,3281.69 ; R3.2@2687,3344.69 2688,3345.69 2688,3374 v1(2689,3375) ; R33.1@2760.83,2436.02 2762.41,2437.61 2762.41,2465.23 v1(2763,2465.82) ; v1(2794,4604) 2797.25,4604 2799.96,4601.28 R19.2@3035,4601.28 3036.87,4603.16 3052.11,4603.16 ccw(c3052.11,4610.51) 3057.31,4605.31 C50.2@3064,4612 ; R9.2@2924,4031.69 v1(2924,4076) ; v1(2977,3132) 2979.98,3132 2990.03,3142.05 3006.8,3142.05 C7.2@3008,3143.25 ; C7.2@3009.97,3143.25 3012.97,3146.25 C2.1@3045,3146.25 3048.84,3150.09 3063.09,3150.09 3071.64,3158.64 3104.71,3158.64 U1.13@3107.4,3161.32 ; v1(3023,3451) 3041.51,3432.49 3055.76,3432.49 C1.1@3060,3428.25 3090.61,3397.64 U1.1@3125.02,3397.64 ; v1(3176,3554) 3177.25,3552.75 C5.1@3177.25,3522 3181.49,3517.76 3181.49,3508.51 3196,3494 3203.66,3494 3203.76,3493.91 U1.64@3203.76,3476.38 ; v1(3212,2873) 3212,2915.6 C6.2@3216.4,2920 3231.5,2935.1 3231.5,2970.75 3243,2982.25 3243,3000.63 3243.13,3000.76 U1.19@3243.13,3023.62 ; U1.32@3499.03,3001.8 U1.32@3499.03,3008.16 ; U1.32@3499.03,3023.62 U1.32@3499.03,3008.16 ; v1(3576.45,2968.46) 3574.91,2970 C4.1@3541.75,2970 3537.51,2974.24 3537.51,2979.49 3508.94,3008.06 3499.13,3008.06 U1.32@3499.03,3008.16 ; U1.48@3577.77,3397.64 3597.95,3397.64 3611.19,3410.87 3626.13,3410.87 C8.2@3628,3412.75 3629.87,3414.62 3647.16,3414.62 3650.8,3418.26 3658.04,3418.26 v1(3660.34,3420.55) ; R7.2@3736,3324.69 3741.33,3330.02 3741.33,3347.56 3745,3351.23 v1(3745,3354.48) ; U5.3@3927,3338 3924.34,3340.66 3924.34,3360.04 3920.62,3363.76 3920.62,3379.13 C70.2@3918.75,3381 3918.75,3382.97 3920.62,3384.84 3924.97,3384.84 3942.13,3402 v1(3943,3402) ; v1(4000,2983) 4002,2981 4024.28,2981 4024.44,2981.16 4028.38,2981.16 C71.1@4030.25,2983.03 ; U5.8@4027,3031.31 4027,2994.8 4028.38,2993.43 4028.38,2986.87 C71.1@4030.25,2985 ; U10.8@4061.64,2911.33 4061.64,2915.76 4062.53,2916.65 4066.96,2916.65 4077.39,2927.08 C59.2@4128.57,2927.08 4130.44,2928.96 4149.71,2928.96 4152.75,2932 v1(4156,2932) ; U10.5@4068.04,2845.88 4090.12,2845.88 4110.34,2825.66 4127.63,2825.66 C58.2@4128.57,2824.72 4130.44,2822.85 4144.91,2822.85 4147.46,2820.3 4154.7,2820.3 v1(4157,2818)
  other v1: 2899,4198 2942.38,4198 2985.77,4198 3029.15,4198 3072.54,4198 3115.92,4198 3159.31,4198 3202.69,4198 3246.08,4198 3289.46,4198 3332.85,4198 3376.23,4198 3419.62,4198
+3V3_RF: C12.1 C25.1 C26.1 C27.1 C28.1 C34.1 C73.2 U2.3 U2.14 U2.24 U3.6 U4.6 U12.1 U12.2 | length 533.7
  L1_Top w10: U4.6@3510.83,1517.72 3512.8,1515.75 C34.1@3563.98,1515.75 3562.49,1514.27 3562.49,1490.94 v1(3561,1489.45) ; v1(3790,2169) 3792.68,2171.68 3797.71,2171.68 3807.09,2181.06 C28.1@3807.09,2204.72 3807.09,2241.14 3813.9,2247.95 3813.9,2303.23 U2.24@3812.99,2304.13 ; 3999.51,2395.67 4000,2395.18 ; U3.6@4105.32,1445.87 ccw(c4110.07,1450.62) 4110.07,1443.9 C12.1@4163.25,1443.9 4162.62,1444.52 4162.62,1477.62 v1(4163,1478)
  L1_Top w11.81: C25.1@3734.87,2570 C25.1@3735.72,2570 ; v1(3739,2603) 3739.13,2602.87 3739.13,2573.42 C25.1@3735.72,2570 ; U2.14@3761.81,2538.39 3761.81,2547.24 3752.95,2547.24 3741.08,2559.12 3741.08,2564.64 C25.1@3735.72,2570 ; U2.3@3955.71,2395.67 3999.51,2395.67 4043.31,2395.67 C26.1@4048.23,2390.75 4049.35,2391.87 4078.87,2391.87 v1(4080,2393)
  other v1: 4280,2491 4220,2492 4218,2554
+5V: C47.1 C48.1 C49.1 C72.1 C74.1 R17.2 R23.2 U6.14 U6.15 U6.16 U7.2 U7.9 U7.10 U8.5 U12.4 U12.6 | length 148.9
  L1_Top w9.84: v1(3464.72,5043) R17.2@3497.47,5043 ; v1(3465.72,5150) 3467.14,5148.58 3497.89,5148.58 R23.2@3498.47,5148 ; v1(3917,3567) 3920.83,3567 3925.65,3571.82 3956.41,3571.82 U8.5@3960.59,3576
  L1_Top w18: U12.4@4317.59,2635.51 U12.4@4317.59,2636.01 4317.59,2640.21 4317.83,2640.45 4320.58,2640.45 4327.85,2647.72 4327.85,2661.85 v1(4330,2664)
  other v1: 4231.55,2636.87 4233.55,2668.28 3081,4534 3356,4556 3448,4557 2896,4569 2926.33,4569 2956.67,4569 2987,4569 3355,4587 3447,4588 3243,4799 3278,4799 3245,4850 3279,4850
ADC1_IN1_SE: P2.32 U1.10 | length 831.3
  L1_Top w9.84: P2.32@2401,3246.64 2543.64,3104 2671,3104 2787.47,3220.47 U1.10@3125.02,3220.47
ADC1_IN2_SE: P2.34 U1.11 | length 813.8
  L1_Top w9.84: P2.34@2401,3167.9 2492.9,3076 2677,3076 2801.79,3200.79 U1.11@3125.02,3200.79
ANT_OFF_N: Q1.2 U11.13 | length 180.7
  L1_Top w13.78: U11.13@2844.49,1570.87 2844.49,1437.01 2860.24,1421.26 Q1.2@2884.84,1421.26
ANT_SHORT_N: C56.2 L11.2 R12.2 U11.3 | length 892
  L1_Top w13.37: R12.2@2953.53,1312 R12.2@2953.73,1312 ; R12.2@2953.53,1313 R12.2@2953.73,1312.8 ; L11.2@2953.9,1215 C56.2@2953.94,1255.91 2953.73,1256.04 R12.2@2953.73,1312 ; U11.3@2974.41,1944.88 2974.41,1878.94 3080,1773.35 3080,1659 3107,1632 3107,1392.43 3027.36,1312.8 R12.2@2953.73,1312.8 ; R12.2@2953.73,1312 R12.2@2953.73,1312.8
DIO0_sx: RN1.4 U2.8 | length 154.4
  L1_Top w10: RN1.4@3883.24,2679.5 3885.28,2677.47 3885.28,2655.72 3915.35,2625.65 U2.8@3915.35,2538.39
DIO1_sx: RN1.3 U2.9 | length 156.9
  L1_Top w10: RN1.3@3851.75,2679.5 3855.03,2676.22 3855.03,2656.97 3889.76,2622.24 U2.9@3889.76,2538.39
DIO2_sx: RN1.2 U2.10 | length 159.3
  L1_Top w10: RN1.2@3820.25,2679.5 3820.25,2667.75 3864.17,2623.83 U2.10@3864.17,2538.39
DIO3_sx: RN1.1 U2.11 | length 161.8
  L1_Top w10: RN1.1@3788.76,2679.5 3792.61,2675.65 3792.61,2665.39 3838.58,2619.42 U2.11@3838.58,2538.39
DIO4_sx: RN2.4 U2.12 | length 213.4
  L1_Top w10: RN2.4@3710,2679.01 3713.86,2675.15 3713.86,2663.66 3719.72,2657.8 3771.2,2657.8 3812.09,2616.91 3812.09,2539.29 U2.12@3812.99,2538.39
DIO5_sx: RN2.3 U2.13 | length 216.5
  L1_Top w10: RN2.3@3678.5,2679.01 3682.36,2675.15 3682.36,2665.64 3708.85,2639.15 3761.39,2639.15 3787.4,2613.14 U2.13@3787.4,2538.39
FLASH_HOLD/RST#: R4.1 R7.1 R15.2 U1.41 | length 259.6
  L1_Top w9.84: U1.41@3577.77,3259.84 3649.84,3259.84 3675.32,3285.32 R7.1@3736,3285.32 3786.65,3285.32 R15.2@3786.77,3285.44 ; R4.1@3787,3246.75 3787.76,3247.5 R15.2@3787.76,3286.43
Flash_LED: D2.2 U13.11 | length 292.8
  L1_Top w9.84: D2.2@2561.71,2062.72 2722.44,2223.44 U13.11@2722.44,2288.9
GND: C1.2 C2.2 C3.2 C4.2 C5.2 C6.1 C7.1 C8.1 C9.2 C12.2 C13.2 C14.2 C18.2 C19.2 C20.2 C21.2 C22.2 C23.2 C25.2 C26.2 C27.2 C28.2 C29.2 C30.2 C31.2 C33.2 C34.2 C35.2 C36.2 C40.2 C41.1 C42.2 C43.1 C44.1 C45.1 C47.2 C48.2 C49.2 C51.1 C52.1 C53.2 C54.2 C56.1 C57.2 C58.1 C59.1 C60.2 C61.2 C63.2 C64.2 C65.2 C66.2 C67.2 C68.2 C69.2 C70.1 C71.2 C72.2 C73.1 C74.2 D1.2 J1.2 J1.3 J1.4 J1.5 J2.2 J2.3 J2.4 J2.5 J3.2 J4.5 J4.6 J4.7 J4.8 J4.9 J4.10 J4.11 J5.2 J5.3 J5.4 J5.5 L1.1 P1.4 P1.6 P1.8 P1.10 P1.12 P1.14 P1.16 P1.18 P1.20 P2.1 P2.3 P2.5 P2.7 P2.9 P2.11 P2.13 P2.15 P2.17 P2.19 P2.21 P2.23 P2.25 P2.27 P2.29 P2.31 P2.33 P2.35 P2.37 P2.39 P2.41 P2.43 Q1.1 R2.2 R13.2 R15.1 R20.1 R24.1 R25.1 R26.2 R27.2 R28.2 R31.2 R32.2 R34.2 SW1.1 U1.12 U1.18 U1.31 U1.47 U1.63 U2.15 U2.23 U2.26 U2.29 U3.2 U4.2 U5.4 U5.9 U6.6 U6.11 U7.1 U7.6 U7.11 U8.2 U9.1 U9.3 U9.4 U9.6 U10.2 U10.3 U10.6 U10.7 U11.1 U11.10 U11.12 U12.3 U12.5 U12.7 U13.9 U13.16 Y1.2 Y1.4 Y2.2 Y2.4 | length 4834.2
  L1_Top w8: C63.2@4098.25,1303.65 4099.43,1304.83 4125.83,1304.83 v1(4127,1306)
  L1_Top w9.84: C9.2@4146.93,2073.82 4181.18,2073.82 v1(4182,2073)
  L1_Top w10: v1(2672,2252) 2690.95,2270.95 U13.9@2690.95,2288.9 ; v1(2745,3504) 2798.42,3504 Y1.2@2798.58,3503.84 ; U13.16@2766.65,2343.35 2794.18,2370.87 2812.96,2370.87 2813.54,2371.45 C69.2@2813.54,2372.21 ; v1@2813.54,2406.46 v1(2811,2409) 2811,2375.8 ccw(c2814.59,2375.8) C69.2@2814.59,2372.21 C69.2@2814.59,2372.5 ; C53.2@2843.29,2073 2843.29,2112.29 v1(2844,2113) ; C54.2@2843.7,2031.5 2843.7,2070.26 C53.2@2844.87,2071.43 ; v1@2872.05,1488.19 v1(2872.05,1486.35) 2872.05,1484.5 2884.84,1471.71 Q1.1@2884.84,1440.94 ; v1(2966.52,3565.5) 2995.81,3565.5 R2.2@2996.31,3566 ; U4.2@3485.24,1612.2 3485.24,1654.24 v1(3487,1656) ; C22.2@3767.72,1984.25 3767.89,1984.08 3792.29,1984.08 3795.21,1987 v1(3799,1987) ; C27.2@3783.47,2252.95 3787.4,2256.89 U2.23@3787.4,2304.13 ; v1(4074,1582) 4074,1578.21 4077.77,1574.44 4077.77,1542.31 U3.2@4079.72,1540.35
  L1_Top w11.81: C57.2@3021.26,1401.57 3026.05,1406.36 3052.34,1406.36 3055.7,1403 v1(3059,1403) ; v1(3283,1137) C67.2@3316.1,1137 ; v1(3396,2053) 3396.07,2053.07 3428.92,2053.07 C40.2@3428.99,2053.15 ; C66.2@3469.63,1309.06 3502.06,1309.06 v1(3504,1311) ; C36.2@3640.75,1774 3641.02,1773.72 3675.28,1773.72 v1(3677,1772) ; C35.2@3641,1930.29 3674.71,1930.29 v1(3676,1929) ; C31.2@3766.87,2078.74 3767.81,2079.68 v1(3801.68,2079.68) ; C21.2@3767.72,2031.5 3768.46,2030.75 3798.25,2030.75 v1(3799,2030) ; v1(3864.17,2252.95) U2.26@3864.17,2304.13 ; C18.2@3889.76,2073.68 3889.76,2034.24 v1(3890,2034) ; v1(3904,1543) 3904.34,1542.66 3942.43,1542.66 C20.2@3942.77,1542.32 ; v1(3907,1925) 3908.18,1926.18 C65.2@3943.62,1926.18 ; v1(4007,1386) 4007.5,1386.5 4007.5,1413.6 C23.2@4008,1414.1 ; C64.2@4022.9,1128 4055,1128 v1(4056,1129) ; C30.2@4068.87,2452 4104,2452 v1(4105,2453) ; C29.2@4202.05,2347.44 4202.33,2347.72 4231.72,2347.72 v1(4232,2348)
  L1_Top w12: v1(2296,2306) 2342.57,2306 R27.2@2349.57,2299 ; v1(2298,2182) 2348.57,2182 R26.2@2350.57,2180 ; v1(2299,1951) 2347.57,1951 R28.2@2349.57,1953 ; v1(2301,2403) 2302,2404 R31.2@2349.13,2404 ; v1(2301.26,2058.02) 2345.59,2058.02 R13.2@2351.57,2064 ; v1(2302,2624) 2303,2625 R34.2@2351.57,2625 ; v1(2304,2516) 2306,2518 R32.2@2349.57,2518 ; v1(2676,2444) 2676,2440.75 2678.47,2438.29 2678.47,2416.27 2681.25,2413.48 C68.2@2681.25,2411 ; v1@2705.31,1325.31 U9.1@2705.31,1385.37 ; v1(2733,3330) 2733,3331.44 2750.7,3349.14 C14.2@2771.02,3349.14 ; v1(2801,1331.26) 2801.18,1331.44 U9.3@2801.18,1371.26 ; v1(2880,3324) 2882.3,3326.3 2882.3,3338.16 2890.31,3346.17 2890.39,3346.17 2899.25,3355.03 C13.2@2899.25,3357 ; Y1.4@2956.06,3409.35 2959.36,3406.05 3007.7,3406.05 3011.75,3402 v1(3015,3402) ; v1(2975,3172) cw(c2981.63,3165.37) 2981.63,3174.75 C7.1@3008,3174.75 cw(c3015.24,3167.51) 3015.24,3177.75 C2.2@3045,3177.75 cw(c3053.1,3169.65) 3053.1,3181.1 U1.12@3125.02,3181.1 ; C1.2@3060,3459.75 3060,3493 v1(3061,3494) ; D1.2@3066,4977.07 3082.07,4961 3173.02,4961 3174.72,4959.3 3181.7,4959.3 v1(3184,4957) ; v1(3140,2872) C6.1@3140,2918.4 ; C6.1@3141.6,2920 3141.6,2921.97 3163.16,2943.53 3165.13,2943.53 3189.36,2967.76 C3.2@3197.02,2967.76 ; C3.2@3204.25,2972 3214.51,2982.26 3214.51,2986.79 3223.44,2995.72 U1.18@3223.44,3023.62 ; v1(3210,3555) 3208.75,3553.75 C5.2@3208.75,3522 3212.98,3517.76 3213.39,3517.76 3223.44,3507.71 U1.63@3223.44,3476.38 ; U6.11@3325.83,4948.39 3385.85,4948.39 ; v1(3405,4932) 3402.24,4932 3385.85,4948.39 ; v1(3406,4961) 3403.7,4958.7 3393.58,4958.7 3385.85,4950.97 3385.85,4948.39 ; v1(3460,5091) 3461.65,5089.35 3496.82,5089.35 R24.1@3497.47,5090 ; v1(3465.1,5199.09) 3496.39,5199.09 R25.1@3498.47,5197 ; U1.31@3479.35,3023.62 3479.35,2993.65 3498.76,2974.24 3506.02,2974.24 3506.02,2965.76 3499.75,2965.76 3486.67,2952.68 v1(3484.56,2952.68) ; v1(3496,4941) 3499.25,4941 3506.63,4948.39 U6.6@3554.17,4948.39 ; U1.47@3577.77,3377.95 3577.87,3378.05 3599.04,3378.05 3601.25,3380.25 3627,3380.25 C8.1@3628,3381.25 3629.87,3383.13 3635.59,3383.13 3636.02,3383.55 v1(3661.34,3383.55) ; v1(3700,2602) 3700.28,2601.72 3700.28,2570.85 C25.2@3701.13,2570 3701.13,2505.06 3708.16,2498.03 U2.15@3721.46,2498.03 ; R15.1@3787.76,3325.8 3794.55,3332.59 3794.55,3341.55 3805.9,3352.9 v1(3805.9,3354.73) ; v1(3858,3391) 3861.25,3391 3863.74,3393.49 3876.73,3393.49 3885.38,3384.84 3885.38,3367.38 3879.66,3361.66 3879.66,3340.66 U5.4@3877,3338 ; v1(4012,2780) 4012,2782.3 4022.27,2792.57 U10.2@4022.27,2819.8 ; v1(4028.8,2561.84) 4045.34,2578.34 4048.17,2578.34 4054.96,2585.13 Y2.2@4054.96,2587.1 Y2.2@4055.94,2586.12 ; v1(4034.11,2516.38) 4034.38,2516.38 4050.08,2532.08 4054.07,2532.08 4055.94,2533.95 C60.2@4055.94,2535.92 ; U10.3@4041.96,2819.8 4041.96,2791.29 4051,2782.25 v1(4051,2779) ; C26.2@4048.39,2356 v1(4088,2356) ; U8.2@4059.41,3576 4106,3576 v1(4108,3574) ; C71.2@4061.75,2985 4062.75,2986 v1(4094,2986) ; U10.6@4068.04,2865.57 4117.7,2865.57 4124.73,2858.54 4124.73,2858.09 4126.6,2856.22 C58.1@4128.57,2856.22 ; U10.7@4068.04,2885.25 4117.7,2885.25 C59.1@4124.73,2892.28 ; C59.1@4124.73,2893.71 4126.6,2895.59 C59.1@4128.57,2895.59 4159.34,2895.59 4161.75,2898 v1(4165,2898) ; C58.1@4128.57,2856.22 4162.78,2856.22 v1(4164,2855) ; v1(4172,3661) 4190.26,3642.74 4190.26,3638.06 4192.13,3636.18 J4.5@4210.83,3636.18 ; C12.2@4193.16,1444 v1(4224,1444) ; J4.6@4219.69,3459.02 4312.21,3459.02 J4.10@4316.15,3455.08 J4.8@4316.15,3537.76 ; J4.7@4219.69,3710.98 4312.21,3710.98 J4.11@4316.15,3714.92 J4.9@4316.15,3632.24
  L1_Top w13: C72.2@4291.62,2703 C72.2@4292,2702.62 ; v1@4291.62,2739.62 v1(4293,2741)
  L1_Top w15.75: v1(2675,1571) 2675.44,1571.44 2713.99,1571.44 U11.10@2714.57,1570.87 ; v1(3576,2179) 3578.23,2179 3581.15,2181.91 3610.27,2181.91 C33.2@3611.08,2181.1 ; v1(3739.17,2246.06) 3776.58,2246.06 3779.53,2249.02 3783.47,2249.02 C27.2@3783.47,2250.98 C27.2@3783.47,2252.95 ; v1(3742,2202) 3743,2203 3770.78,2203 C28.2@3772.5,2204.72 ; v1(3893,1747) 3895.23,1747 3897.25,1749.02 C19.2@3942.77,1749.02 ; L1.1@4139.73,2271 4139.73,2271.18 4140.72,2272.17 4166.85,2272.17 v1(4168.02,2273.33)
  L1_Top w18: v1(2801.18,1425.2) U9.4@2801.18,1471.26 U11.12@2801.18,1570.87 ; C72.2@4291.62,2703 v1@4291.62,2739.62 ; U12.5@4292,2635.51 U12.5@4292,2636.01 C72.2@4292,2702.62